# Altium PCB transmitter.PcbDoc (part 1 of 2)
Units mil, origin at the board's own origin, x right, y up, seen from the top; angles counter-clockwise.
Board outline 2708.66 x 1574.8 mil, 2 copper layers (Top Layer, Bottom Layer), stack 65.792 mil thick; 44 components, 23 nets, 159 pads, 72 vias.
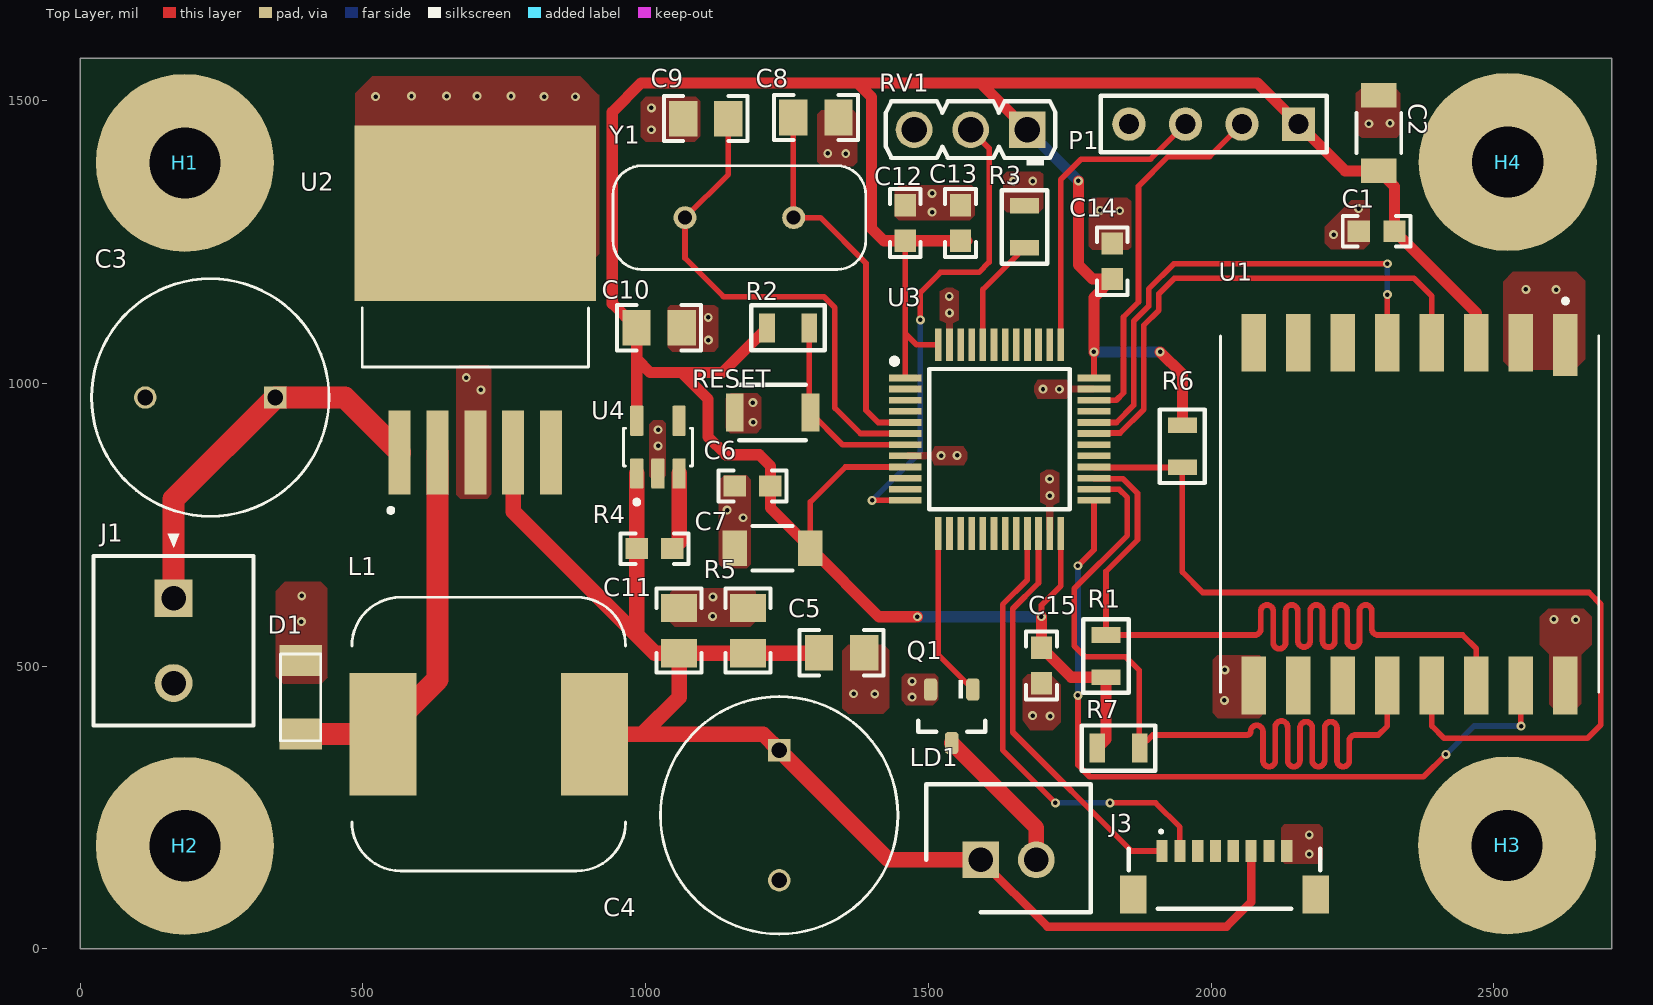
[diagram p0: Top Layer view]
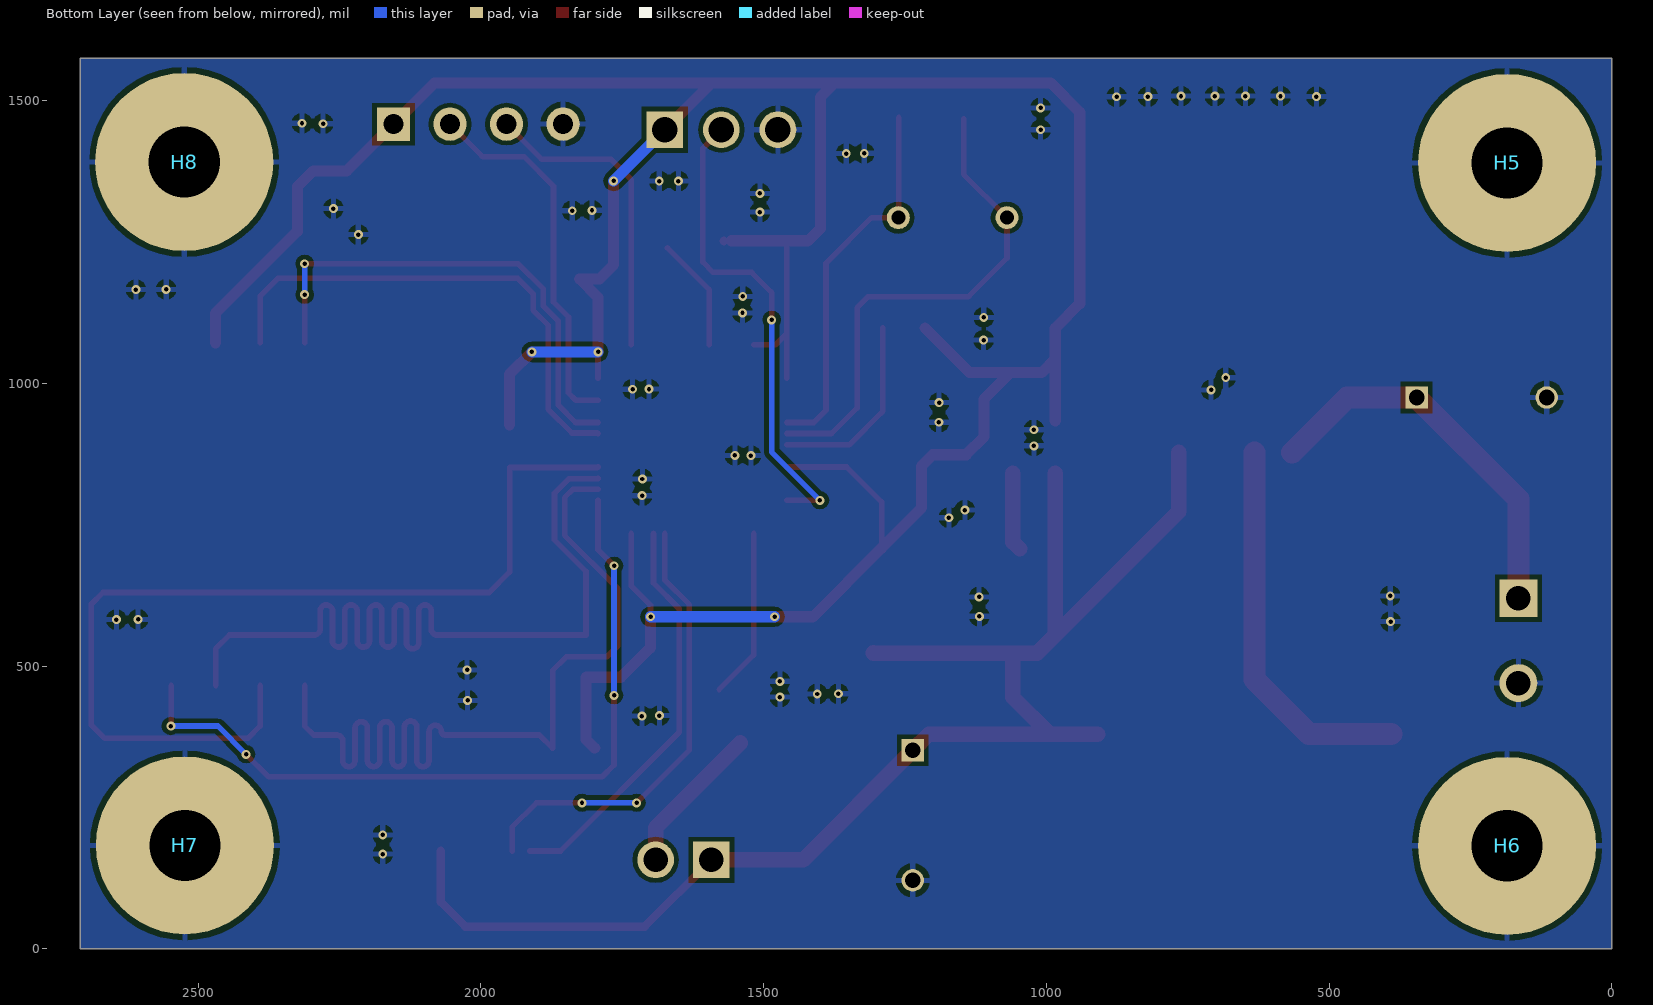
[diagram p1: Bottom Layer view, seen from below]
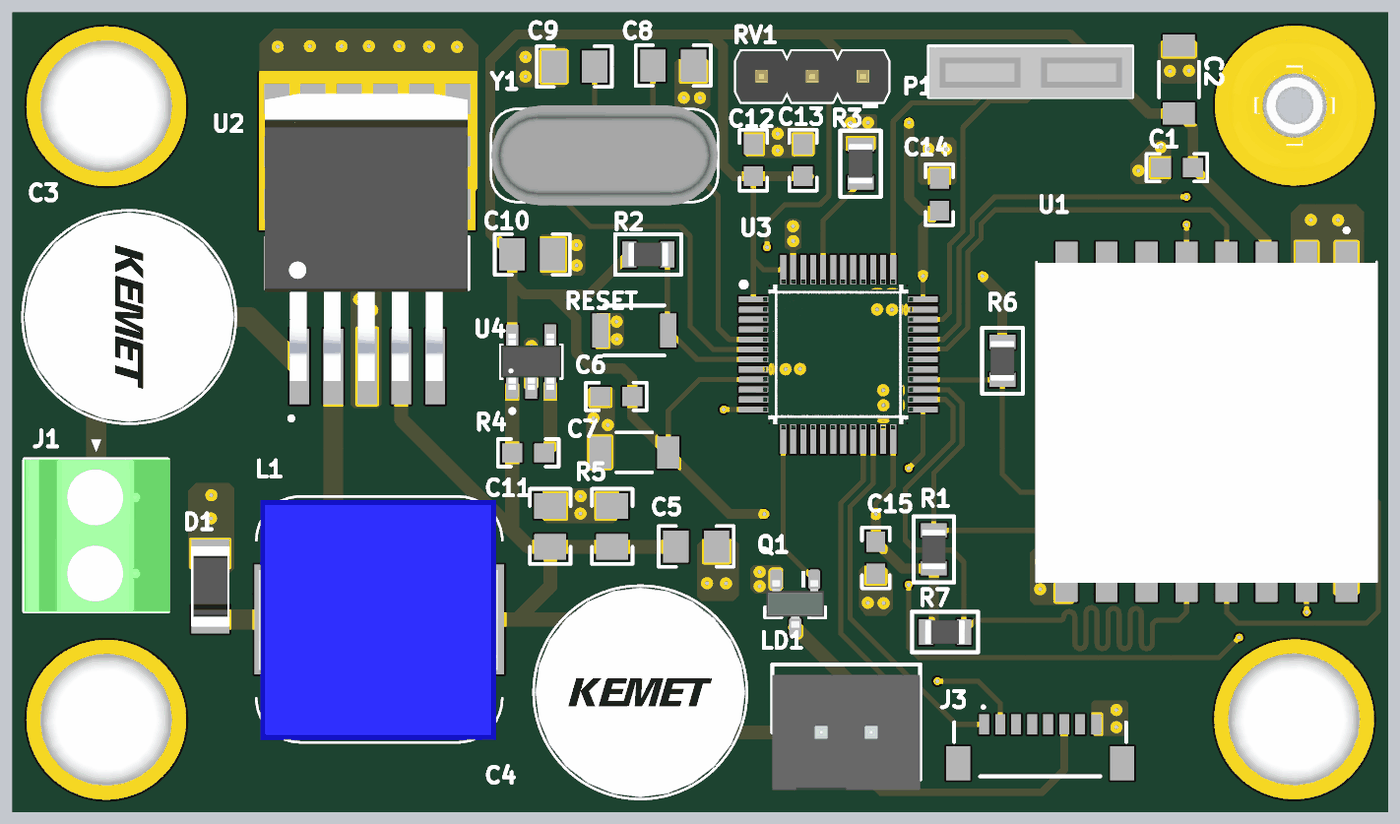
[diagram p2: 3D render of the assembled board from above, using the file's embedded part models]

## Layer stack, top to bottom
Top Solder: solder mask 0.4, Solder Resist, Dk 3.5
Top Layer: signal copper 1.4
Dielectric 1: dielectric 62.9921, FR-4, Dk 4.8
Bottom Layer: signal copper 1.4
Bottom Solder: solder mask 0.4, Solder Resist, Dk 3.5

## Board outline
0,0.39 0,1575.2 2708.66,1575.2 2708.66,0.39

## Design rules (kind name [scope] priority, off if disabled: settings)
Clearance [All] p1: gap=7.87 ignorepadtopadclearanceinfootprint=TRUE
ComponentClearance [All] p1: gap=0 collisioncheckmode=3 verticalgap=0 showdistances=FALSE
HoleSize [All] p1: absolutevalues=TRUE maxlimit=137.8 minlimit=1 maxpercent=80.000 minpercent=20.000
MatchedLengths SPI_Trace [InNetClass('SPI')] p1: tolerance=39.37 checknetsindiffpair=FALSE checkdiffpairvsdiffpair=TRUE checkxsignals=TRUE checkothers=TRUE
MinimumSolderMaskSliver [All] p1: minsoldermaskwidth=0
PolygonConnect [All] p1: connectstyle=Relief reliefconductorwidth=10 reliefentries=4 polygonreliefangle="90 Angle" airgapwidth=10
RoutingVias [All] p1: holewidth=7.87 width=15.75 viastyle="Through Hole" minholewidth=7.87 minwidth=15.75 maxholewidth=7.87 maxwidth=15.75
SilkToSilkClearance [All] p1: silktosilkclearance=0
SilkToSolderMaskClearance [IsPad] p1: minsilkscreentomaskgap=0 clearancetoexposedcopper=TRUE
SolderMaskExpansion [All] p1: expansion=4
Width 12V_W [InNet('~12V')] p1: maxlimit=39.37 minlimit=10 preferedwidth=39.37
Width 3V3_W [InNet('3V3')] p2: maxlimit=19.68 minlimit=10 preferedwidth=19.68
Width 5V_W [InNet('+5V')] p3: maxlimit=27.56 minlimit=10 preferedwidth=27.56
Width [All] p4: maxlimit=39.37 minlimit=10 preferedwidth=10
25 further rules are at their usual default settings.

## Classes and differential pairs
net class SPI: MISO MOSI SCK
net class PWR: 3V3 +5V NetD1_2 ~12V
component class transmitter: C1 C2 C3 C4 C5 C6 C7 C8 C9 C10 C11 C12 C13 C14 C15 D1 J1 J3 L1 LD1 P1 Q1 R1 R2 R3 R4 R5 R6 R7 RESET RV1 U2 U3 U4 Y1
component class tr_auxiliary: H1 H2 H3 H4 H5 H6 H7 H8

## Components (designator, comment, footprint, x,y, rotation, side; value= is the part's Value field where it differs from the comment)
C1 "C1608X6S1C225K080AC" 0603 2292.91,1269.29 r180 top value=2.2uF
C2 "C3216X5R1V226M160AC" 1206_180 2296.85,1442.91 r90 top value=22uF
C3 "220u" CAPPRD250W50D630H1120B 230,975.2 r180 top
C4 "220u" CAPPRD250W50D630H1120B 1236.22,236.22 r270 top
C5 "EMK212BB7106MG-T" 0805_HV 1346.46,523.62 r0 top value=10uF
C6 "C1608X6S1C225K080AC" 0603 1188.98,818.9 r180 top value=2.2uF
C7 "C3216X5R1V226M160AC" 1206_180 1224.41,708.66 r180 top value=22uF
C8 "0805YD225KAT2A" 0805_HV 1301.18,1470.47 r0 top value=22pF
C9 "0805YD225KAT2A" 0805_HV 1106.3,1468.5 r180 top value=22pF
C10 "0805YD225KAT2A" 0805_HV 1023.62,1098.43 r0 top value=2.2uF
C11 "0805YD225KAT2A" 0805_HV 1059.06,562.99 r90 top value=2.2uF
C12 "C1608X6S1C225K080AC" 0603 1459.06,1283.86 r90 top value=2.2uF
C13 "C1608X6S1C225K080AC" 0603 1556.69,1283.86 r90 top value=2.2uF
C14 "C1608X6S1C225K080AC" 0603 1825.2,1216.14 r90 top value=2.2uF
C15 "C1608X6S1C225K080AC" 0603 1700,501.18 r270 top value=2.2uF
D1 "5.1V/0.5W" SOD-123 389.76,444.88 r90 top
H1 "NY PMS 440 0025 PH" "NY PMS 440 0025 PH" 185,1390.2 r0 top
H2 "NY PMS 440 0025 PH" "NY PMS 440 0025 PH" 185,182.32 r0 top
H3 "NY PMS 440 0025 PH" "NY PMS 440 0025 PH" 2523.62,183.07 r0 top
H4 "NY PMS 440 0025 PH" "NY PMS 440 0025 PH" 2524.8,1391.73 r0 top
H5 "1902C" Keystone_1902C 185,1390.2 r180 bottom
H6 "1902C" Keystone_1902C 185,182.32 r180 bottom
H7 "1902C" Keystone_1902C 2523.62,183.07 r180 bottom
H8 "1902C" Keystone_1902C 2524.8,1391.73 r180 bottom
J1 "1727010" PhoenixConact_1727010 165,545.2 r270 top
J3 "SM08B-SURS-TF(LF)(SN)" SM08B-SURS-TF 2023.62,177.17 r0 top
L1 "33uH" IND_MSS1210-153MEB 722.44,379.92 r90 top
LD1 "Header-2pin(2.5mm)" B2B-XH-A(LF)(SN) 1592.52,157.48 r0 top
P1 "0901471104" HDR1X4 2154.72,1458.66 r180 top
Q1 "DNBT8105-7" SOT-23 1541.34,411.42 r270 top value="60 V"
R1 "10K" R0805 1814.17,517.72 r270 top
R2 "10K" R0805 1251.97,1098.43 r180 top
R3 "10K" R0805 1670.08,1277.17 r270 top
R4 "CRCW060310K0JNEA" 0603 1015.75,707.87 r180 top value=10k
R5 "CRCW0805510KJNEA" 0805_HV 1181.1,562.99 r270 top value=510k
R6 "10K" R0805 1949.21,888.98 r90 top
R7 "10K" R0805 1836.22,355.12 r180 top
RESET "B3U-1000P" SW_B3U-1000P 1224.41,948.82 r180 top
RV1 "Potentiometer" WURTH_61300311121 1574.8,1448.82 r180 top
U1 "RA-02/SX1278" MODULE_RA-02_LORA 2351.18,768.9 r270 top
U2 "LM2596S-5.0/NOPB" TO170P1524X483-6N 698.82,1129.92 r90 top
U3 "STM32L053C8T6" QFP50P900X900X160-48N 1625.98,901.57 r0 top
U4 "AP2112K-3.3TRG1" SOT95P285X140-5N 1021.65,887.4 r90 top
Y1 "16MHz" XTAL_ECS-160-20-4XDN 1165.75,1293.31 r180 top

## Footprints (in the part's own frame and the unit in brackets; to place one, negate y for a bottom-side part, rotate by r counter-clockwise, add the part's x,y. Pads: shape width x height; smd on the part's side, far side on the other; paste and mask are expansions set on the pad)
0603 [mm]
  rect 1x0.95 smd: 1(-0.8,0) 2(0.8,0)
  silkscreen extent -1.52,-0.69 1.52,0.69, body extent -0.87,-0.47 0.87,0.47, height 1
0805_HV [mil]
  rect 50x63 smd: 1(-40,0) 2(40,0)
  silkscreen extent -74,-40 74,40, body extent -43,-29 43,29, height 57
1206_180 [mm] "1206_180"
  rect 1.1x1.6 smd: 1(-1.7,0) 2(1.7,0)
  silkscreen extent -0.9,-1 0.9,1, body extent -1.75,-0.95 1.75,0.95, height 1.8
B2B-XH-A(LF)(SN) [mm]
  rect 1.65x1.65 hole 1.1: 1(0,0)
  round 1.65 hole 1.1: 2(2.5,0)
  silkscreen extent -2.45,-2.35 4.95,3.4, body extent -2.45,-2.88 4.95,2.88, height 7
CAPPRD250W50D630H1120B [mil]
  rect 39.69x39.69 hole 27.56: 1(-115,0)
  round 39.69 hole 27.56: 2(115,0)
  silkscreen extent -210,-210 210,210, body extent -207,-207 207,207, height 670
HDR1X4 [mm] "Connector; Header; 4 Position"
  rect 1.5x1.5 hole 0.9: 1(0,0)
  round 1.5 hole 0.9: 2(2.54,0) 3(5.08,0) 4(7.62,0)
  silkscreen extent -1.27,-1.27 8.89,1.27, body extent -1.28,-1.22 8.88,1.32, height 8.51
IND_MSS1210-153MEB [mm]
  rect 5.5x3 smd: 1(0,4.75) 2(0,-4.75)
  silkscreen extent -6.15,-6.15 6.15,6.15, body extent -6.03,-5.95 5.97,6.05, height 10.2
Keystone_1902C [mil]
  round 1 on Mech3: 0(0,0)
  body extent -145,-126 146,126, height 501
MODULE_RA-02_LORA [mm]
  rect 2.8x1.1 smd: 1(-7.6,7)
  rect 2.6x1.1 smd: 2(-7.7,5) 3(-7.7,3) 4(-7.7,1) 5(-7.7,-1) 6(-7.7,-3) 7(-7.7,-5) 8(-7.7,-7) 9(7.7,-7) 10(7.7,-5) 11(7.7,-3) 12(7.7,-1) 13(7.7,1) 14(7.7,3) 15(7.7,5) 16(7.7,7)
  silkscreen extent -9.68,-8.5 8,8.5, body extent -7.96,-8.47 8.04,8.53, height 2
"NY PMS 440 0025 PH" [mm]
  round 8 hole 3.2: 1(0,0)
  body extent -3.3,-3.3 3.3,3.3, height 2.69
PhoenixConact_1727010 [mm]
  rect 1.7x1.7 hole 1.1: 1(-1.905,0)
  round 1.7 hole 1.1: 2(1.905,0)
  silkscreen extent -4.8,-3.6 3.81,3.6, body extent -3.81,-3.6 3.81,3.7, height 8.52
QFP50P900X900X160-48N [mm]
  rect 1.475x0.3 smd: 1(-4.238,2.75) 2(-4.238,2.25) 3(-4.238,1.75) 4(-4.238,1.25) 5(-4.238,0.75) 6(-4.238,0.25) 7(-4.238,-0.25) 8(-4.238,-0.75) 9(-4.238,-1.25) 10(-4.238,-1.75) 11(-4.238,-2.25) 12(-4.238,-2.75) 25(4.238,-2.75) 26(4.238,-2.25) 27(4.238,-1.75) 28(4.238,-1.25) 29(4.238,-0.75) 30(4.238,-0.25) 31(4.238,0.25) 32(4.238,0.75) 33(4.238,1.25) 34(4.238,1.75) 35(4.238,2.25) 36(4.238,2.75)
  rect 0.3x1.475 smd: 13(-2.75,-4.238) 14(-2.25,-4.238) 15(-1.75,-4.238) 16(-1.25,-4.238) 17(-0.75,-4.238) 18(-0.25,-4.238) 19(0.25,-4.238) 20(0.75,-4.238) 21(1.25,-4.238) 22(1.75,-4.238) 23(2.25,-4.238) 24(2.75,-4.238) 37(2.75,4.238) 38(2.25,4.238) 39(1.75,4.238) 40(1.25,4.238) 41(0.75,4.238) 42(0.25,4.238) 43(-0.25,4.238) 44(-0.75,4.238) 45(-1.25,4.238) 46(-1.75,4.238) 47(-2.25,4.238) 48(-2.75,4.238)
  silkscreen extent -4.85,-3.15 3.15,3.62, body extent -4.5,-4.5 4.5,4.5, height 1.6
R0805 [mm]
  rect 0.7x1.3 smd: 1(-0.95,0) 2(0.95,0)
  silkscreen extent -1.65,-1.02 1.65,1.02, body extent -1,-0.6 1,0.6, height 0.7
SM08B-SURS-TF [mm]
  rect 0.5x1 smd: 1(-2.8,-0.1) 2(-2,-0.1) 3(-1.2,-0.1) 4(-0.4,-0.1) 5(0.4,-0.1) 6(1.2,-0.1) 7(2,-0.1) 8(2.8,-0.1)
  rect 1.2x1.7 smd: 9(-4.1,-2.05) 10(4.1,-2.05)
  silkscreen extent -4.3,-2.7 4.3,0.8
SOD-123 [mm]
  rect 1.4x1.9 smd: 1(1.65,0) 2(-1.65,0)
  silkscreen extent -1.95,-0.9 1.95,0.9, body extent -1.95,-0.85 1.95,1.65, height 4.52
SOT95P285X140-5N [mm]
  rrect15% 1.35x0.6 smd: 1(-1.185,0.95) 2(-1.185,0) 3(-1.185,-0.95) 4(1.185,-0.95) 5(1.185,0.95)
  silkscreen extent -2.57,-1.55 0.85,1.55, body extent -1.4,-1.5 1.4,1.5, height 1.31
SOT-23 [mm]
  rrect50% 1x0.6 smd: 1(-1.2,0.95) 2(-1.2,-0.95) 3(1.2,0)
  silkscreen extent -1.63,-1.5 0.7,1.5, body extent -1.16,-1.45 1.21,1.45, height 1
SW_B3U-1000P [mm]
  rect 0.8x1.7 smd: 1(-1.7,0) 2(1.7,0)
  silkscreen extent -1.5,-1.25 1.5,1.25, body extent -1.5,-1.25 1.5,1.25, height 1.75
TO170P1524X483-6N [mm]
  rect 3.79x0.99 smd: 1(-6.4,3.4) 2(-6.4,1.7) 3(-6.4,0) 4(-6.4,-1.7) 5(-6.4,-3.4)
  rect 7.88x10.84 smd paste-6: 6(4.35,0)
  silkscreen extent -9.1,-5.08 0.09,5.08, body extent -7.13,-5.03 7.23,5.13, height 4.66
WURTH_61300311121 [mm]
  rect 1.65x1.65 hole 1.15: 1(-2.54,0)
  round 1.65 hole 1.15: 2(0,0) 3(2.54,0)
  silkscreen extent -3.81,-1.27 3.81,1.6, body extent -3.81,-1.27 3.81,1.27, height 8.54
XTAL_ECS-160-20-4XDN [mm]
  round 1.03 hole 0.63: 1(-2.44,0) 2(2.44,0)
  silkscreen extent -5.68,-2.33 5.68,2.33, body extent -5.68,-2.5 5.67,2.5, height 2.11

## Part data
C1 C6: "CAP, CERM, 2.2 µF, 16 V, +/- 10%, X6S, 0603", Cap_Case=0603, Manufacturer=TDK, Supplier Part Number 1=445-7438-1-ND, TempCo=X6S, Tolerance_%=10, Value1="0.007674 ohm", Value2=16V, ValueDisplayed=2.2µF, AEC Category=Q200, AEC Grade=N/A, AEC Qualified=N, Cap_F=0.0000022, ComponentLink1Description="Datasheet link", ComponentLink1URL=https://product.tdk.com/en/search/capacitor/ceramic/mlcc/info?part_no=C1608X6S1C225K080AC, CompType=Capacitor, ESR_ohm=0.007674, IRMS_A=1.87823, LatestRevisionDate=2017-04-28, MountType=SMT, PackageReference=0603, PartNumber=C1608X6S1C225K080AC, Polarized=N, Published=2008-06-19, Publisher="Texas Instruments", RoHS=Y, SizeArea_mm2=1.28, SizeAreaWB_mm2=4.68, SizeX_mm=1.6, SizeY_mm=0.8, SizeZ_mm=1, Supplier 1=Digi-Key, Supplier 2=Mouser, Supplier Part Number 2=810-C1608X6S1C225K080AC, SymbolVersion=2008-07-09, TaMax_C=105, TaMin_C=-55, Technology=Ceramic, U/M=EA, VDC_V=16
C2 C7: "CAP, CERM, 22 µF, 35 V,+/- 20%, X5R, 1206", Cap_Case=1206, Manufacturer=TDK, Supplier Part Number 1=445-8045-1-ND, TempCo=X5R, Tolerance_%=20, Value1="0.002398 ohm", Value2=35V, ValueDisplayed=22µF, AEC Category=Q200, AEC Grade=N/A, AEC Qualified=N, Cap_F=0.000022, ComponentLink1Description="Datasheet link", ComponentLink1URL=https://product.tdk.com/en/search/capacitor/ceramic/mlcc/info?part_no=C3216X5R1V226M160AC, CompType=Capacitor, ESR_ohm=0.002398, Green_EU RoHS=Passed, Green_EU RoHS-2=Passed, Green_Lifecycle=Active, Green_REACh=Passed, IRMS_A=4.68507, LatestRevisionDate=2017-06-22, MountType=SMT, PackageReference=1206, PartNumber=C3216X5R1V226M160AC, Polarized=N, Published=2008-06-19, Publisher="Texas Instruments", RoHS=Y, SizeArea_mm2=5.12, SizeAreaWB_mm2=10.92, SizeX_mm=3.2, SizeY_mm=1.6, SizeZ_mm=1.8, Supplier 1=Digi-Key, Supplier 2=Newark, Supplier 3=Mouser, Supplier Part Number 2=04X3299, Supplier Part Number 3=810-C3216X5R1V226M, SymbolVersion=2008-07-09, TaMax_C=85, TaMin_C=-55, Technology=Ceramic, U/M=EA, VDC_V=35
C3 C4: library part UCS2C221MHD1TN, "CAP ALUM 220UF 20% 160V RADIAL", Capacitance=220uF, Case/Package=Radial, Manufacturer=Nichicon, Max Operating Temperature=105°C, Min Operating Temperature=-40°C, Package Quantity=250, Ripple Current=2.37A, Supplier Part Number 1=493-13277-3-ND, Tolerance=20%, Voltage Rating=160V, ComponentLink1Description=http://www.nichicon.co.jp/english/products/pdfs/e-cs.pdf?src-supplier=Avnet, ComponentLink1URL=http://www.nichicon.co.jp/english/products/pdfs/e-cs.pdf?src-supplier=Avnet, ComponentLink2Description=http://nichicon-us.com/english/products/pdfs/e-ucs.pdf?src-supplier=Digi-Key, ComponentLink2URL=http://nichicon-us.com/english/products/pdfs/e-ucs.pdf?src-supplier=Digi-Key, ComponentLink3Description=http://nichicon-us.com/english/products/pdfs/e-ch_ta.pdf?src-supplier=Digi-Key, ComponentLink3URL=http://nichicon-us.com/english/products/pdfs/e-ch_ta.pdf?src-supplier=Digi-Key, ComponentLink4Description=http://www.nichicon.co.jp/english/products/pdfs/e-cs.pdf?src-supplier=Avnet+Europe, ComponentLink4URL=http://www.nichicon.co.jp/english/products/pdfs/e-cs.pdf?src-supplier=Avnet+Europe, Diameter=16mm, Height=25mm, Height - Seated (Max)=1.063inch, Lead Diameter=0.8mm, Lead Pitch=7.5mm, Life (Hours)=10000Hour, Manufacturer Part Number=UCS2C221MHD1TN, Mount="Through Hole", Packaging="Tape and Reel", Pricing 1="250=0.7974, 500=0.6778, 750=0.6379, 1250=0.5981, 2500=0.5582, 6250=0.5383, 12500=0.5084, 25000=0.4984 (USD)", Radiation Hardening=No, Stock 1=84250, Supplier 1=Digi-Key, Termination=Radial
C5: "CAP, CERM, 10 µF, 16 V, +/- 20%, X7R, 0805", Cap_Case=0805, Manufacturer="Taiyo Yuden", Supplier Part Number 1=587-3319-1-ND, TempCo=X7R, Tolerance_%=20, Value1=Unknown, Value2=16V, ValueDisplayed=10µF, AEC Category=Q200, AEC Qualified=?, Cap_F=0.00001, ComponentLink1Description="Datasheet link", ComponentLink1URL=http://www.yuden.co.jp/productdata/catalog/en/mlcc_all_e.pdf, CompType=Capacitor, LatestRevisionDate=2017-01-20, MountType=SMT, PackageReference=0805, PartNumber=EMK212BB7106MG-T, Polarized=N, Published=2008-06-19, Publisher="Texas Instruments", RoHS=Y, SizeArea_mm2=2.5, SizeAreaWB_mm2=6.75, SizeX_mm=2, SizeY_mm=1.25, SizeZ_mm=1.45, Supplier 1=Digi-Key, Supplier 2=Mouser, Supplier Part Number 2=963-EMK212BB7106MG-T, SymbolVersion=2008-07-09, TaMax_C=125, TaMin_C=-55, Technology=Ceramic, U/M=EA, VDC_V=16
C8 C9: "CAP, CERM, 2.2 µF, 16 V, +/- 10%, X5R, 0805", Cap_Case=0805, Manufacturer=AVX, Supplier Part Number 1=478-2580-1-ND, TempCo=X5R, Tolerance_%=10, Value1="0.009 ohm", Value2=16V, ValueDisplayed=22pF, Cap_F=0.0000022, ComponentLink1Description="Datasheet link", ComponentLink1URL=http://www.avx.com/docs/masterpubs/smccp.pdf, CompType=Capacitor, ESR_ohm=0.009, LatestRevisionDate=2014-12-30, MountType=SMT, PackageReference=0805, PartNumber=0805YD225KAT2A, Polarized=N, Published=2008-06-19, Publisher="Texas Instruments", RoHS=Y, Supplier 1=Digi-Key, Supplier 2=Mouser, Supplier 3=Farnell, Supplier Part Number 2=581-0805YD225K, Supplier Part Number 3=1650715, SymbolVersion=2008-07-09, TaMax_C=85, TaMin_C=-55, Technology=Ceramic, U/M=EA, VDC_V=16
C10 C11: "CAP, CERM, 2.2 µF, 16 V, +/- 10%, X5R, 0805", Cap_Case=0805, Manufacturer=AVX, Supplier Part Number 1=478-2580-1-ND, TempCo=X5R, Tolerance_%=10, Value1="0.009 ohm", Value2=16V, ValueDisplayed=2.2µF, Cap_F=0.0000022, ComponentLink1Description="Datasheet link", ComponentLink1URL=http://www.avx.com/docs/masterpubs/smccp.pdf, CompType=Capacitor, ESR_ohm=0.009, LatestRevisionDate=2014-12-30, MountType=SMT, PackageReference=0805, PartNumber=0805YD225KAT2A, Polarized=N, Published=2008-06-19, Publisher="Texas Instruments", RoHS=Y, Supplier 1=Digi-Key, Supplier 2=Mouser, Supplier 3=Farnell, Supplier Part Number 2=581-0805YD225K, Supplier Part Number 3=1650715, SymbolVersion=2008-07-09, TaMax_C=85, TaMin_C=-55, Technology=Ceramic, U/M=EA, VDC_V=16
C12 C13 C14 C15: "CAP, CERM, 2.2 µF, 16 V, +/- 10%, X6S, 0603", Cap_Case=0603, Manufacturer=TDK, Supplier Part Number 1=445-7438-1-ND, TempCo=X6S, Tolerance_%=10, Value1="0.007674 ohm", Value2=16V, ValueDisplayed=0.1µF, AEC Category=Q200, AEC Grade=N/A, AEC Qualified=N, Cap_F=0.0000022, ComponentLink1Description="Datasheet link", ComponentLink1URL=https://product.tdk.com/en/search/capacitor/ceramic/mlcc/info?part_no=C1608X6S1C225K080AC, CompType=Capacitor, ESR_ohm=0.007674, IRMS_A=1.87823, LatestRevisionDate=2017-04-28, MountType=SMT, PackageReference=0603, PartNumber=C1608X6S1C225K080AC, Polarized=N, Published=2008-06-19, Publisher="Texas Instruments", RoHS=Y, SizeArea_mm2=1.28, SizeAreaWB_mm2=4.68, SizeX_mm=1.6, SizeY_mm=0.8, SizeZ_mm=1, Supplier 1=Digi-Key, Supplier 2=Mouser, Supplier Part Number 2=810-C1608X6S1C225K080AC, SymbolVersion=2008-07-09, TaMax_C=105, TaMin_C=-55, Technology=Ceramic, U/M=EA, VDC_V=16
D1: library part "5.1V/0.5W zener", "Diode Zener Single 5.1V 5% 500mW 2-Pin SOD-123 T/R", Case/Package=SOD-123-2, Forward Voltage=900mV, Manufacturer=Diodes, Manufacturer Part Number=MMSZ5231B-7-F, Max Operating Temperature=150°C, Max Power Dissipation=500mW, Max Reverse Current=5uA, Min Operating Temperature=-65°C, Package Quantity=3000, Supplier Part Number 1=MMSZ5231B-FDIDKR-ND, Test Current=20mA, Tolerance=5%, Voltage Rating (DC)=5.1V, ComponentLink1Description=http://www.jameco.com/Jameco/Products/ProdDS/1541116.pdf?src-supplier=Jameco, ComponentLink1URL=http://www.jameco.com/Jameco/Products/ProdDS/1541116.pdf?src-supplier=Jameco, ComponentLink2Description=http://www.mouser.com/ds/2/115/ds18010-38133.pdf?src-supplier=Mouser, ComponentLink2URL=http://www.mouser.com/ds/2/115/ds18010-38133.pdf?src-supplier=Mouser, ComponentLink3Description=https://www.verical.com/server-webapp/html/getDatasheet?partID=141394&src-supplier=Verical, ComponentLink3URL=https://www.verical.com/server-webapp/html/getDatasheet?partID=141394&src-supplier=Verical, Contact Plating=Tin,Matte, Element Configuration=Single, ESD Protection=No, Height=1.35mm, Impedance=17R, Lead Free="Lead Free", Length=3.85mm, Max Reverse Leakage Current=5uA, Mount="Surface Mount", Number of Pins=2, Packaging="Tape and Reel", Power Dissipation=500mW, Power Rating=500mW, Pricing 1="1=0.14, 10=0.126, 100=0.0596, 500=0.0354, 1000=0.0232 (USD)", Radiation Hardening=No, REACH SVHC="No SVHC", Stock 1=856806, Supplier 1=Digi-Key, Termination=SMD/SMT, Voltage Tolerance=5%, Weight=0.000353oz, Width=1.7mm, Working Voltage=5.1V, Zener Current=5uA, Zener Voltage=5.1V
H1 H2 H3 H4: "Machine Screw, Round, #4-40 x 1/4, Nylon, Philips panhead", DigiKeyPartNumber=H542-ND, Manufacturer="B&F Fastener Supply", ClassName="Mounting Holes", ComponentLink1Description="Datasheet Link", ComponentLink1URL=http://www.fasnetdirect.com/refguide/Nylpanms.pdf, CompType=Hardware, LatestRevisionDate=2015-08-27, MountType=N/A, PackageReference=Screw, PartNumber="NY PMS 440 0025 PH", Publisher="Texas Instruments", RoHS=Y, Supplier 1=Digi-Key, Supplier Part Number 1=H542-ND, SymbolCreator=codlsc, SymbolVersion=2009-10-28, U/M=EA
H5 H6 H7 H8: "Standoff, Hex, 0.5\"L #4-40 Nylon", Manufacturer=Keystone, Supplier Part Number 1=36-1902C-ND, ComponentLink1Description="Datasheet Link", ComponentLink1URL=http://www.keyelco.com/pdfs/M55-prod31.pdf, CompType=Hardware, LatestRevisionDate=2015-08-27, MountType=N/A, PackageReference=Standoff, PartNumber=1902C, Publisher="Texas Instruments", RoHS=Y, Supplier 1=Digi-Key, SymbolCreator=a0412235, SymbolVersion=2013-06-24
J1: "Conn Term Block, 2POS, 3.81mm, TH", Manufacturer="Phoenix Contact", Supplier Part Number 1=277-1947-ND, ComponentLink1Description="Datasheet URL", ComponentLink1URL=http://eshop.phoenixcontact.com/phoenix/pdf.do?UID=1727010&general=usen, CompType="Terminal Block", LatestRevisionDate=2016-07-13, MountType=TH, PackageReference="2POS Terminal Block", PartNumber=1727010, Publisher="Texas Instruments", RoHS=Y, Supplier 1=Digi-Key, SymbolCreator=a0412235, SymbolVersion=2013-09-04
J3: "CONN HEADER SMD R/A 8POS 0.8MM", Color=Natural, Current Rating=500mA, Flammability Rating="UL94 V-0", Insulation Resistance=100MR, Manufacturer=JST, Max Operating Temperature=85°C, Min Operating Temperature=-25°C, Supplier Part Number 1=455-2040-6-ND, Voltage Rating=50V, Working Voltage=30V, Body Plating=Tin, ComponentLink1Description=http://www.jst-mfg.com/product/pdf/eng/eSUR.pdf?src-supplier=Digi-Key, ComponentLink1URL=http://www.jst-mfg.com/product/pdf/eng/eSUR.pdf?src-supplier=Digi-Key, ComponentLink2Description=http://www.jst-mfg.com/product/pdf/eng/eSUR.pdf?src-supplier=Future+Electronics, ComponentLink2URL=http://www.jst-mfg.com/product/pdf/eng/eSUR.pdf?src-supplier=Future+Electronics, Connector Type="Outer Shroud Contact", Contact Material="Copper Alloy,Bronze,Brass", Contact Plating=Tin, Contact Type="Outer Shroud Contact", Gender=Male, Insulation Material=Nylon, Lead Free="Lead Free", Lead Pitch=0.8mm, Manufacturer Part Number=SM08B-SURS-TF(LF)(SN), Material=Polyamide, Mount="Surface Mount", Number of Contacts=8, Number of Poles=8, Number of Positions=8, Number of Rows=1, Packaging="Tape and Reel", Pitch=0.031inch, Pricing 1="1=1.09, 10=0.958, 100=0.8263, 500=0.6761, 1000=0.6009 (USD)", REACH SVHC="No SVHC", Series=SUR, Stock 1=2871, Supplier 1=Digi-Key, Termination=IDC, Wire/Cable Gauge=32AWG
L1: library part MSS1210-333MEB, "Inductor COILCRAFT         MSS1210-333MEB             Surface Mount Power Inductor, MSS1210 Series, 1 mH, 1 A, 980 mA, Shielded, 1.03 ohm", Case/Package=SMD/SMT, DC Resistance (DCR)=1.03R, Inductance=1mH, Inductance Tolerance=10%, Manufacturer=Coilcraft, Manufacturer Part Number=MSS1210-105KED, Max DC Current=1A, Max Operating Temperature=85°C, Min Operating Temperature=-40°C, Package Quantity=300, Saturation Current=980mA, Self Resonant Frequency=1.1MHz, Supplier Part Number 1=994-MSS1210-105KED, Test Frequency=100kHz, ComponentLink1Description=http://www.farnell.com/datasheets/1681953.pdf?src-supplier=Element14, ComponentLink1URL=http://www.farnell.com/datasheets/1681953.pdf?src-supplier=Element14, ComponentLink2Description=http://www.mouser.com/ds/2/597/mss1210-270677.pdf?src-supplier=Mouser, ComponentLink2URL=http://www.mouser.com/ds/2/597/mss1210-270677.pdf?src-supplier=Mouser, Core Material=Ferrite, Height=10.2mm, Lead Free="Contains Lead", Length=12.3mm, Mount="Surface Mount", Packaging="Tape and Reel", Pricing 1="1=2.26, 10=2.02, 50=1.82, 100=1.62, 1000=1.17, 10000=1.09 (USD)", REACH SVHC="No SVHC", RMS Current (Irms)=1A, Series=MSS1210, Shielding=Shielded, Stock 1=518, Supplier 1=Mouser, Termination=SMD/SMT, Tolerance=10%, Width=12.3mm
LD1: library part B2B-XH-A(LF)(SN), "Conn Shrouded Header (4 Sides) HDR 2 POS 2.5mm Solder ST Thru-Hole Box", Color=Natural, Contact Resistance=20mR, Current Rating=3A, Housing Color=White, Insulation Resistance=1GR, Manufacturer=JST, Max Operating Temperature=85°C, Max Voltage Rating (AC)=250V, Min Operating Temperature=-25°C, Supplier Part Number 1=455-2247-ND, ComponentLink1Description=http://www.farnell.com/datasheets/2057209.pdf?src-supplier=Element14, ComponentLink1URL=http://www.farnell.com/datasheets/2057209.pdf?src-supplier=Element14, ComponentLink2Description=http://www.rapidonline.com/pdf/523653.pdf?src-supplier=Rapid+Electronics, ComponentLink2URL=http://www.rapidonline.com/pdf/523653.pdf?src-supplier=Rapid+Electronics, ComponentLink3Description=https://www.verical.com/server-webapp/html/getDatasheet?partID=640357&src-supplier=Verical, ComponentLink3URL=https://www.verical.com/server-webapp/html/getDatasheet?partID=640357&src-supplier=Verical, ComponentLink4Description=https://www.verical.com/server-webapp/html/getDatasheet?partID=385291&src-supplier=Verical, ComponentLink4URL=https://www.verical.com/server-webapp/html/getDatasheet?partID=385291&src-supplier=Verical, Connector Type="Male Pin", Contact Material=Brass, Contact Plating=Tin,Copper,Lead, Contact Type="Male Pin", Depth=5.75mm, Fastening Type=Detent, Housing Material=Polyamide, Lead Free="Lead Free", Lead Pitch=2.5mm, Length=7.4mm, Manufacturer Part Number=B2B-XH-A(LF)(SN), Max Current Rating=3A, Max Voltage Rating (DC)=250V, Mount="Through Hole", Number of Contacts=2, Number of Positions=2, Number of Rows=1, Orientation=Straight, Packaging=Bulk, Pitch=2.5mm, Pricing 1="1=0.15, 10=0.141, 25=0.1048, 50=0.0898, 250=0.0748, 750=0.0673, 1000=0.0628, 12000=0.0479, 24000=0.0434 (USD)", REACH SVHC="No SVHC", Series=XH, Stock 1=124367, Supplier 1=Digi-Key, Termination=Solder, Voltage Rating=250V, Voltage Rating (AC)=250V, Wire/Cable Gauge=22AWG
P1: "Conn Socket Strip F 4 POS 2.54mm Solder ST Thru-Hole C-Grid® Tube", Color=Black, Manufacturer=Molex, Max Operating Temperature=105°C, Min Operating Temperature=-55°C, Package Quantity=4160, Supplier Part Number 1=WM14831-ND, ComponentLink1Description=http://www.molex.com/pdm_docs/sd/901471102_sd.pdf?src-supplier=Digi-Key, ComponentLink1URL=http://www.molex.com/pdm_docs/sd/901471102_sd.pdf?src-supplier=Digi-Key, Connector Type=Receptacle, Contact Material=Bronze, Contact Plating=Tin, Contact Type="Female Socket", Depth=2.54mm, Housing Color=Black, Housing Material=Polyester, Length=10.16mm, Manufacturer Part Number=0901471104, Mount="Through Hole", Number of Contacts=4, Number of Positions=4, Number of Rows=1, Orientation=Straight, Packaging=Rail/Tube, Pitch=0.1inch, Pricing 1="1=1.51, 10=1.288, 100=1.064, 1000=0.84, 5000=0.7448, 10000=0.728 (USD)", Series="C-Grid® 90147", Stock 1=23124, Supplier 1=Digi-Key, Termination=Solder
Q1: library part "DNBT8105-7, Diodes Inc.", "Transistor, NPN, 60 V, 1 A, AEC-Q101, SOT-23", Manufacturer="Diodes Inc.", Supplier Part Number 1=DNBT8105DICT-ND, Value1="1 A", Value2=300, AEC Category=Q101, AEC Qualified=Y, ComponentLink1Description="Datasheet link", ComponentLink1URL=https://www.diodes.com/assets/Datasheets/ds30513.pdf, CompType=BJT, HfeMax=300, IcRated_A=1, LatestRevisionDate=2017-04-05, MountType=SMT, NPN=1, PackageReference=SOT-23, PartNumber=DNBT8105-7, PNP=0, Published=2008-07-31, Publisher="Texas Instruments", RoHS=Y, SizeArea_mm2=7.5, SizeAreaWB_mm2=14, SizeX_mm=2.5, SizeY_mm=3, SizeZ_mm=1.1, Supplier 1=Digi-Key, Supplier 2=Newark, Supplier 3=Mouser, Supplier Part Number 2=25R4543, Supplier Part Number 3=621-DNBT8105-7, SymbolVersion=2008-07-31, TaMax_C=150, TaMin_C=-55, U/M=EA, Vceo_V=60, Vcesat1_V=0.25
R1 R2 R3 R6 R7: library part RC0805FR-0722RL, "RES SMD 22 OHM 1% 1/8W 0805", Manufacturer=Yageo, Operating Temperature="-55°C ~ 155°C", Package / Case="0805 (2012 Metric)", Power (Watts)="0.125W, 1/8W", Resistance (Ohms)=22, Supplier Device Package=0805, Supplier Part Number 1=311-22.0CRCT-ND, Temperature Coefficient=±100ppm/°C, Tolerance=±1%, .Checked PCB=RF, .Checked SCH=RF, .Creator=MM, Category=Resistors, ComponentLink1Description=http://www.yageo.com/documents/recent/PYu-RC_Group_51_RoHS_L_1.pdf, ComponentLink1URL=http://www.yageo.com/documents/recent/PYu-RC_Group_51_RoHS_L_1.pdf, Composition="Thick Film", Features="Moisture Resistant", Height="0.024\" (0.60mm)", Manufacturer Part Number=RC0805FR-0722RL, Number of Terminations=2, Packaging="Cut Tape (CT)", Pricing 1="1=0.1, 10=0.021, 25=0.0148, 100=0.0084, 250=0.0064, 500=0.0051, 1000=0.00376, 2500=0.00326 (USD)", RoHS="RoHS Compliant", Size / Dimension="0.079\" L x 0.049\" W (2.00mm x 1.25mm)", Stock 1=63849, Supplier 1=Digi-Key
R4: "RES, 10 k, 5%, 0.1 W, 0603", Manufacturer=Vishay-Dale, Power_W=0.1, Supplier Part Number 1=541-10KGCT-ND, TempCo="200 ppm/C", Tolerance_%=5, Value1=5%, Value2=0.1W, Value_Code=10k0, ValueDisplayed=10k, AEC Category=Q200, AEC Qualified=?, ComponentLink1Description="Datasheet link", ComponentLink1URL=http://www.vishay.com/docs/20035/dcrcwe3.pdf, CompType=Resistor, EIA_Code=E24, LatestRevisionDate=2016-07-29, MountType=SMT, PackageReference=0603, PartNumber=CRCW060310K0JNEA, Published=2008-06-26, Publisher="Texas Instruments", Res_ohm=10000, RoHS=Y, SizeArea_mm2=1.28, SizeX_mm=1.6, SizeY_mm=0.8, SizeZ_mm=1, Supplier 1=Digi-Key, Supplier 2=Mouser, Supplier 3=Farnell, Supplier Part Number 2=71-CRCW0603J-10K-E3, Supplier Part Number 3=1469749, SymbolVersion=2009-05-29, Technology="Thick Film", U/M=EA, VDC_V=75
R5: "RES, 510 k, 5%, 0.125 W, 0805", Manufacturer=Vishay-Dale, Power_W=0.125, Supplier Part Number 1=541-510KACT-ND, TempCo="200 ppm/C", Tolerance_%=5, Value1=5%, Value2=0.125W, Value_Code=510k, AEC Category=Q200, AEC Qualified=?, ComponentLink1Description="Datasheet link", ComponentLink1URL=http://www.vishay.com/docs/20035/dcrcwe3.pdf, CompType=Resistor, EIA_Code=E24, LatestRevisionDate=2016-05-05, MountType=SMT, PackageReference=0805, PartNumber=CRCW0805510KJNEA, Published=2008-06-26, Publisher="Texas Instruments", Res_ohm=510000, RoHS=Y, Supplier 1=Digi-Key, Supplier 2=Mouser, Supplier 3=Farnell, Supplier Part Number 2=71-CRCW0805J-510K-E3, Supplier Part Number 3=1537987, SymbolVersion=2009-05-29, Technology="Thick Film", U/M=EA, ValueDisplayed=510k, VDC_V=150
RESET: "SWITCH TACTILE SPST-NO 0.05A 12V", CurrentRating_mA=50, Manufacturer="Omron Electronic Components", Supplier Part Number 1=SW1020CT-ND, Circuit=SPST-NO, ComponentLink1Description="Datasheet URL", ComponentLink1URL=http://www.components.omron.com/components/web/PDFLIB.nsf/0/2DD3893C7DD33E9E862572900079E9D6/$file/B3U_1110.pdf, CompType=Switch, LatestRevisionDate=2015-08-27, MountType=SMT, Orientation="Top Actuated", PackageReference=3x1.6x2.5mm, PartNumber=B3U-1000P, PositionCount=1, Publisher="Texas Instruments", RoHS=Y, Supplier 1=Digi-Key, Supplier 2=Mouser, Supplier 3=Farnell, Supplier Part Number 2=653-B3U-1000P, Supplier Part Number 3=1333652, SwitchFunction=Off-Mom, SymbolCreator=a0412235, SymbolVersion=2012-10-29, VDC_V=12
RV1: library part 61300311121, "Header, 2.54 mm, 3x1, Gold, TH", Manufacturer="Wurth Elektronik", Supplier Part Number 1=732-5316-ND, ClassName=Header, ComponentLink1Description="Datasheet Link", ComponentLink1URL=http://katalog.we-online.de/em/datasheet/6130xx11121.pdf, CompType=Header, LatestRevisionDate=2015-05-12, MountType=TH, PackageReference="Header, 2.54mm, 3x1, TH", PartNumber=61300311121, Publisher="Texas Instruments", RoHS=Y, Supplier 1=Digi-Key, SymbolCreator=a0799628, SymbolVersion=2013-03-28, U/M=EA
U1: library part RA-02, "LoRA module"
U2: "Conv DC-DC 4.5V to 40V Inv/Step Down Single-Out 5V 3A 6-Pin(5+Tab) TO-263 Tube", Case/Package=TO-263, Manufacturer="TI National Semiconductor", Max Input Voltage=40V, Max Operating Temperature=125°C, Max Output Current=3A, Min Input Voltage=4.5V, Min Operating Temperature=-40°C, Nominal Output Voltage=5V, Package Quantity=45, Quiescent Current=5mA, Supplier Part Number 1=926-LM2596S-5.0/NOPB, Switching Frequency=173kHz, ComponentLink1Description=https://www.verical.com/server-webapp/html/getDatasheet?partID=112894&src-supplier=Verical, ComponentLink1URL=https://www.verical.com/server-webapp/html/getDatasheet?partID=112894&src-supplier=Verical, ComponentLink2Description=http://www.ti.com/lit/ds/symlink/lm2596.pdf?src-supplier=Digi-Key, ComponentLink2URL=http://www.ti.com/lit/ds/symlink/lm2596.pdf?src-supplier=Digi-Key, ComponentLink3Description=http://www.farnell.com/datasheets/1874590.pdf?src-supplier=Element14, ComponentLink3URL=http://www.farnell.com/datasheets/1874590.pdf?src-supplier=Element14, ComponentLink4Description=https://www.distrelec.biz/Web/Downloads/xx/_e/jqLM2596x-xx_e.pdf?mime=application%2Fpdf&src-supplier=Distrelec, ComponentLink4URL=https://www.distrelec.biz/Web/Downloads/xx/_e/jqLM2596x-xx_e.pdf?mime=application%2Fpdf&src-supplier=Distrelec, ComponentLink5Description=http://www.ti.com/lit/ds/symlink/lm2596.pdf?src-supplier=Avnet+Asia, ComponentLink5URL=http://www.ti.com/lit/ds/symlink/lm2596.pdf?src-supplier=Avnet+Asia, ComponentLink6Description=http://www.jameco.com/Jameco/Products/ProdDS/836385.pdf?src-supplier=Jameco, ComponentLink6URL=http://www.jameco.com/Jameco/Products/ProdDS/836385.pdf?src-supplier=Jameco, ComponentLink7Description=http://www.produktinfo.conrad.com/datenblaetter/1000000-1099999/001013813-da-01-en-IC_REG_BUC_LM2596S_5_0_NOPB_TO_263_5_TID.pdf?src-supplier=Conrad, ComponentLink7URL=http://www.produktinfo.conrad.com/datenblaetter/1000000-1099999/001013813-da-01-en-IC_REG_BUC_LM2596S_5_0_NOPB_TO_263_5_TID.pdf?src-supplier=Conrad, Contact Plating=Tin,Matte, Efficiency=80%, Height=4.57mm, Lead Free="Contains Lead", Length=10.16mm, Manufacturer Part Number=LM2596S-5.0/NOPB, Mount="Surface Mount", Number of Outputs=1, Number of Pins=5, Operating Supply Voltage=40V, Output Current=3A, Output Type=Fixed, Output Voltage=5V, Packaging=Rail/Tube, Pricing 1="1=5.73, 10=5.15, 50=4.86, 100=4, 1000=2.88, 10000=2.77 (USD)", Radiation Hardening=No, REACH SVHC="No SVHC", Series=LM2596, Stock 1=1433, Supplier 1=Mouser, Weight=0.25lb, Width=8.64mm
U3: "IC MCU 32BIT 64KB FLASH 48LQFP", Case/Package=LQFP, Frequency=32MHz, Manufacturer=STMicroelectronics, Max Operating Temperature=85°C, Max Power Dissipation=363mW, Max Supply Voltage=3.6V, Min Operating Temperature=-40°C, Min Supply Voltage=1.8V, Package Quantity=1500, Supplier Part Number 1=497-14906-ND, ComponentLink1Description=http://www.st.com/st-web-ui/static/active/en/resource/technical/document/datasheet/DM00105960.pdf?src-supplier=Avnet, ComponentLink1URL=http://www.st.com/st-web-ui/static/active/en/resource/technical/document/datasheet/DM00105960.pdf?src-supplier=Avnet, Core Architecture=ARM, Data Bus Width=32b, Interface=I2C,SPI,USB,IrDA,UART,USART,I2S, Manufacturer Part Number=STM32L053C8T6, Max Frequency=32MHz, Memory Size=64KB, Memory Type=FLASH, Mount="Surface Mount", Number of ADC Channels=10, Number of I/Os=37, Number of Pins=48, Number of Programmable I/O=37, Number of Timers/Counters=5, Oscillator Type=Internal, Packaging=Tray, Peripherals="Brown-out Detect/Reset,POR,PWM,WDT,DMA,LCD", Pricing 1="1=4.81, 10=4.317, 25=4.0808, 80=3.5366, 250=3.3553, 500=3.0107, 1000=2.645 (USD)", RAM Size=8KB, REACH SVHC="No SVHC", Stock 1=7814, Supplier 1=Digi-Key, Watchdog Timer=Yes, Weight=0.006409oz
U4: "IC REG LINEAR 3.3V 600MA SOT25", Case/Package=SOT-23-5, Dropout Voltage=250mV, Manufacturer=Diodes, Max Input Voltage=6V, Max Operating Temperature=85°C, Max Output Current=600mA, Min Input Voltage=2.5V, Min Operating Temperature=-40°C, Output Voltage=3.3V, Package Quantity=1, Quiescent Current=55uA, Supplier Part Number 1=AP2112K-3.3TRG1DIDKR-ND, Accuracy=1.5%, ComponentLink1Description=http://www.diodes.com/datasheets/AP2112.pdf?src-supplier=Avnet, ComponentLink1URL=http://www.diodes.com/datasheets/AP2112.pdf?src-supplier=Avnet, ComponentLink2Description=https://www.diodes.com/assets/Datasheets/AP2112.pdf?src-supplier=Digi-Key, ComponentLink2URL=https://www.diodes.com/assets/Datasheets/AP2112.pdf?src-supplier=Digi-Key, Height=1.3mm, Lead Free="Lead Free", Length=3.1mm, Manufacturer Part Number=AP2112K-3.3TRG1, Mount="Surface Mount", Number of Outputs=1, Number of Pins=5, Number of Regulators=1, Output Current=600mA, Output Type=Fixed, Packaging="Tape and Reel", Polarity=Positive, Pricing 1="1=0.47, 10=0.355, 25=0.32, 100=0.1745, 250=0.1687, 500=0.1513, 1000=0.1164 (USD)", Stock 1=20198, Supplier 1=Digi-Key, Width=1.7mm
Y1: library part AS-16.000MAHK-B, "Crystals 16.000MHz 30ppm 20pF -40C to 85C", ESR (Equivalent Series Resistance)=50R, Frequency Stability=30ppm, Load Capacitance=20pF, Manufacturer=TXC, Max Operating Temperature=85°C, Min Operating Temperature=-40°C, Package Quantity=1000, Ratings=AEC-Q200, Supplier Part Number 1=887-1591-ND, ComponentLink1Description=http://www.txccrystal.com/images/pdf/as-automotive.pdf?src-supplier=Digi-Key, ComponentLink1URL=http://www.txccrystal.com/images/pdf/as-automotive.pdf?src-supplier=Digi-Key, ComponentLink2Description=http://www.farnell.com/datasheets/1639152.pdf?src-supplier=Element14, ComponentLink2URL=http://www.farnell.com/datasheets/1639152.pdf?src-supplier=Element14, ComponentLink3Description=http://www.farnell.com/datasheets/1639152.pdf?src-supplier=Farnell, ComponentLink3URL=http://www.farnell.com/datasheets/1639152.pdf?src-supplier=Farnell, ComponentLink4Description=http://www.mouser.com/ds/2/417/as-automotive-10001.pdf?src-supplier=Mouser, ComponentLink4URL=http://www.mouser.com/ds/2/417/as-automotive-10001.pdf?src-supplier=Mouser, ComponentLink5Description=http://components.arrow.com/part/dataview/57418299S591311N4258?src-supplier=Arrow+Electronics, ComponentLink5URL=http://components.arrow.com/part/dataview/57418299S591311N4258?src-supplier=Arrow+Electronics, Depth=5mm, Frequency=16MHz, Frequency Tolerance=30ppm, Height=0.145inch, Length=11.5mm, Manufacturer Part Number=AS-16.000MAHK-B, Mount="Through Hole", Number of Pins=2, Packaging=Bulk, Pricing 1="1=0.54, 10=0.45, 50=0.405, 100=0.36, 500=0.342, 1000=0.288, 2500=0.27, 5000=0.261, 10000=0.252 (USD)", REACH SVHC="No SVHC", Stock 1=672, Supplier 1=Digi-Key, Termination=Radial, Tolerance=30ppm, Width=0.197inch

## Via types
v1: diameter 15.75, hole 7.87, Top Layer to Bottom Layer, 72 vias

## Nets (pads, with @x,y where several pads share a name; then routed paths per layer and width w, separated by ;. In a path a pad name is that pad's centre, name@x,y a point inside that pad or via, vN(x,y) a via of type N, cw(c..) or ccw(c..) an arc to the next point about the centre after c; other vN are vias at no path point)
3V3: C1.1 C2.1 C6.1 C7.1 C10.1 C12.1 C13.1 C14.1 C15.1 P1.1 R1.2 R2.2 R6.2 R7.2 RV1.1 U1.3 U3.1 U3.9 U3.24 U3.36 U3.48 U4.5 | length 5970.6
  Top Layer w10: C7.1 1291.34,790.55 1353.15,852.36 U3.9 ; C12.1 1459.06,1088.58 ; U3.1 1459.06,1009.92 1459.06,1088.58 ; U3.48 1479.21,1068.43 1459.06,1088.58 ; v1(1700,587.4) 1700,607.87 1734.25,642.13 U3.24 ; U3.36 1792.91,1009.92 v1(1792.91,1055.91)
  Top Layer w15: C13.1@1570.47,1252.36 C13.1@1570.87,1251.97
  Top Layer w19.68: U4.5 984.25,1043.31 ; R2.2 1135.83,1019.68 1062.99,1019.68 ; v1(1480.71,587.4) 1412.6,587.4 C7.1 1220.47,779.53 C6.1 1220.47,854.33 1200.79,874.02 1141.73,874.02 1110.24,905.51 1110.24,972.44 1062.99,1019.68 ; C13.1 C12.1 1421.26,1252.36 1399.21,1274.41 1399.21,1506.69 1374.41,1531.5 ; RV1.1 1592.13,1531.5 ; v1(1700,587.4) C15.1 1700.45,532.68 1752.81,480.31 R1.2 1814.17,370.47 R7.2 ; v1(1765.35,1358.27) 1765.35,1209.84 1790.55,1184.65 C14.1 1792.91,1152.36 v1(1792.91,1055.91) ; v1(1909.84,1055.91) 1949.21,1016.54 R6.2 ; U1.3 2469.29,1124.41 C1.1 2324.41,1348.43 C2.1 2237.4,1375.98 P1.1 2081.89,1531.5 1592.13,1531.5 ; 984.25,1043.31 984.25,1097.8 C10.1 940.94,1141.1 940.94,1480.32 992.13,1531.5 1374.41,1531.5 ; 984.25,1043.31 1007.87,1019.68 1062.99,1019.68 ; 1374.41,1531.5 1592.13,1531.5
  Bottom Layer w19.68: v1(1480.71,587.4) v1(1700,587.4) ; RV1.1 v1(1765.35,1358.27) ; v1(1792.91,1055.91) v1(1909.84,1055.91)
+5V: C4.1 C5.1 C11.1 J3.6 L1.2 LD1.1 R4.2 R5.2 U2.4 U4.1 | length 2615.7
  Top Layer w15: LD1.1 1710.63,39.37 2027.56,39.37 2070.87,82.68 J3.6
  Top Layer w27.56: U2.4 765.75,773.62 984.25,555.12 ; L1.2 994.09,379.92 ; U4.1 R4.2 984.25,555.12 ; C5.1 1305.83,522.99 C11.1 ; LD1.1 1429.96,157.48 C4.1 1207.52,379.92 994.09,379.92 ; 984.25,555.12 1016.38,522.99 C11.1 ; 994.09,379.92 1059.06,444.88 C11.1
AD_CH_IN: RV1.2 U3.12 | length 853.5
  Top Layer w10: v1(1400.39,793.31) U3.12 ; v1(1485.83,1112.6) 1485.83,1161.02 1521.26,1196.46 1589.37,1196.46 1607.48,1214.57 1607.48,1416.14 RV1.2
  Bottom Layer w10: v1(1400.39,793.31) 1485.83,878.74 v1(1485.83,1112.6)
BOOT0: R3.2 U3.44 | length 201.8
  Top Layer w10: U3.44 1596.46,1166.14 R3.2
diode: Q1.1 U3.13 | length 301.3
  Top Layer w10: U3.13 1517.72,519.68 Q1.1
EN: U1.15 U3.25 | length 1381.3
  Top Layer w10: v1(1764.57,448.43) 1764.57,325.2 1785.43,304.33 2375.59,304.33 v1(2415.35,344.09) ; v1(1764.57,677.56) 1792.83,705.83 U3.25 ; U1.15 2548.03,394.49 v1(2548.43,394.09)
  Bottom Layer w10: v1(1764.57,448.43) v1(1764.57,677.56) ; v1(2415.35,344.09) 2465.35,394.09 v1(2548.43,394.09)
G0: U1.5 U3.32 | length 879.9
  Top Layer w10: U3.32 1832.68,931.1 1863.39,961.81 1863.39,1110.55 1889.53,1136.69 1889.53,1167.09 1934.25,1211.81 v1(2311.81,1211.81) ; U1.5 v1(2311.81,1157.09)
  Bottom Layer w10: v1(2311.81,1157.09) v1(2311.81,1211.81)
GND: C1.2 C2.2 C3.2 C4.2 C5.2 C6.2 C7.2 C8.2 C9.2 C10.2 C11.2 C12.2 C13.2 C14.2 C15.2 D1.1 H1.1 H2.1 H3.1 H4.1 J1.2 J3.8 P1.4 Q1.2 R3.1 R5.1 RESET.2 RV1.3 U1.1 U1.2 U1.9 U1.16 U2.3 U2.6 U3.8 U3.23 U3.35 U3.47 U4.2
  other v1: 2173.62,167.72 2173.62,201.57 1684.25,412.6 1715.35,411.81 2023.62,439.37 1471.26,445.28 1367.72,451.18 1405.12,450.79 1471.26,473.23 2024.41,493.31 390.94,578.74 2606.3,582.68 2644.88,582.28 1118.5,588.19 1118.9,622.44 391.73,624.41 1172.44,762.6 1144.09,775.98 1714.96,801.57 1714.57,831.1 1522.44,872.44 1550.79,872.83 1022.05,889.76 1022.05,918.11 1190.16,931.5 1189.76,966.14 708.66,988.58 1702.76,990.16 1731.89,989.76 682.68,1010.24 1111.02,1076.77 1110.63,1116.93 1537.4,1124.8 1537.01,1153.94 2556.69,1166.54 2610.24,1166.14 2216.93,1263.39 1506.69,1303.15 1838.58,1305.51 1803.54,1306.3 2261.02,1309.45 1506.69,1336.22 1650.79,1357.87 1684.65,1357.87 1353.94,1406.69 1322.05,1407.09 1010.24,1448.82 2279.13,1459.45 2316.54,1460.24 1010.24,1487.4 522.44,1507.48 820.47,1507.48 875.59,1507.09 585.83,1508.27 648.03,1508.27 701.97,1508.27 761.81,1508.27
MISO: R1.1 U1.14 U3.27 | length 1708.2
  Top Layer w10: U3.27@1792.83,831.77 U3.27 1793.74,831.77 1843.9,831.77 1869.84,805.83 1869.84,723.39 1814.17,667.72 R1.1 2077.17,555.12 ccw(c2077.17,566.02) 2088.07,566.02 2088.07,597.44 cw(c2098.98,597.44) 2098.98,608.34 cw(c2098.98,597.44) 2109.88,597.44 2109.88,555.12 2109.88,541.62 ccw(c2120.79,541.62) 2120.79,530.72 ccw(c2120.79,541.62) 2131.69,541.62 2131.69,555.12 2131.69,597.44 cw(c2142.6,597.44) 2142.6,608.34 cw(c2142.6,597.44) 2153.5,597.44 2153.5,555.12 2153.5,544.81 ccw(c2164.41,544.81) 2164.41,533.9 ccw(c2164.41,544.81) 2175.31,544.81 2175.31,555.12 2175.31,597.44 cw(c2186.22,597.44) 2186.22,608.34 cw(c2186.22,597.44) 2197.13,597.44 2197.13,555.12 2197.13,544.57 ccw(c2208.03,544.57) 2208.03,533.66 ccw(c2208.03,544.57) 2218.94,544.57 2218.94,555.12 2218.94,597.44 cw(c2229.84,597.44) 2229.84,608.34 cw(c2229.84,597.44) 2240.75,597.44 2240.75,555.12 2240.75,544.81 ccw(c2251.65,544.81) 2251.65,533.9 ccw(c2251.65,544.81) 2262.56,544.81 2262.56,555.12 2262.56,597.44 cw(c2273.46,597.44) 2273.46,608.34 cw(c2273.46,597.44) 2284.37,597.44 2284.37,566.02 ccw(c2295.28,566.02) 2295.28,555.12 2307.09,555.12 2444.88,555.12 2469.29,530.71 U1.14
MOSI: R6.1 U1.13 U3.28 | length 1708.2
  Top Layer w10: U3.28 1793.74,851.46 R6.1@1949.21,851.46 ; R6.1 R6.1@1949.21,851.46 ; U1.13 2390.55,394.09 2412.2,372.44 2665.75,372.44 2689.37,396.06 2689.37,609.45 2668.5,630.32 1985.43,630.32 1949.21,666.54 R6.1@1949.21,851.46
NetD1_2: D1.2 L1.1 U2.2 | length 683.7
  Top Layer w39.37: D1.2 L1.1 631.89,476.38 U2.2
NetLD1_2: LD1.2 Q1.3 | length 268.7
  Top Layer w27.56: Q1.3 1690.94,214.57 LD1.2
NetR4_1: R4.1 U4.3 | length 137.8
  Top Layer w27.56: R4.1 1059.05,719.68 U4.3
OSC_IN: C8.1 U3.5 Y1.1 | length 677
  Top Layer w10: C8.1 1261.18,1293.94 Y1.1 1309.06,1293.31 1389.76,1212.6 1389.76,952.76 1411.42,931.1 U3.5
OSC_OUT: C9.1 U3.6 Y1.2 | length 900.3
  Top Layer w10: C9.1 1146.3,1369.92 Y1.2 1069.68,1221.65 1137.8,1153.54 1314.96,1153.54 1334.65,1133.86 1334.65,956.69 1379.92,911.42 U3.6
RESET: R2.1 RESET.1 U3.7 | length 341.9
  Top Layer w10: R2.1 1289.37,950.79 RESET.1 1348.43,891.73 U3.7
RST: U1.4 U3.31 | length 911.3
  Top Layer w10: U3.31 1793.74,912.32 1839.18,912.32 1881.26,954.41 1881.26,1103.15 1907.4,1129.29 1907.4,1158.58 1935.04,1186.22 2358.66,1186.22 2390.55,1154.33 U1.4
RXD: J3.2 U3.21 | length 813.3
  Top Layer w10: U3.21 1675.2,652.84 1631.34,608.98 1631.34,351.73 v1(1724.8,258.27) ; v1(1821.26,258.27) 1901.97,258.27 1944.88,215.35 J3.2
  Bottom Layer w10: v1(1724.8,258.27) v1(1821.26,258.27)
SCK: R7.1 U1.12 U3.26 | length 1707
  Top Layer w10: U3.26 1837.4,812.99 1851.97,798.43 1851.97,731.1 1757.87,637.01 1757.87,536.22 1777.56,516.54 1849.21,516.54 1873.23,492.52 R7.1@1873.23,355.12 ; R7.1 1896.85,378.35 2059.06,378.35 2063.82,378.35 ccw(c2063.82,384.49) 2069.96,384.49 cw(c2080.87,384.49) 2080.87,395.39 cw(c2080.87,384.49) 2091.77,384.49 2091.77,378.35 2091.77,333.11 ccw(c2102.68,333.11) 2102.68,322.2 ccw(c2102.68,333.11) 2113.58,333.11 2113.58,378.35 2113.58,392.24 cw(c2124.49,392.24) 2124.49,403.15 cw(c2124.49,392.24) 2135.39,392.24 2135.39,378.35 2135.39,333.11 ccw(c2146.3,333.11) 2146.3,322.2 ccw(c2146.3,333.11) 2157.2,333.11 2157.2,378.35 2157.2,390.79 cw(c2168.11,390.79) 2168.11,401.69 cw(c2168.11,390.79) 2179.02,390.79 2179.02,378.35 2179.02,333.11 ccw(c2189.92,333.11) 2189.92,322.2 ccw(c2189.92,333.11) 2200.83,333.11 2200.83,378.35 2200.83,390.79 cw(c2211.73,390.79) 2211.73,401.69 cw(c2211.73,390.79) 2222.64,390.79 2222.64,378.35 2222.64,333.11 ccw(c2233.54,333.11) 2233.54,322.2 ccw(c2233.54,333.11) 2244.45,333.11 2244.45,367.44 cw(c2255.35,367.44) 2255.35,378.35 2278.35,378.35 2295.67,378.35 2311.81,394.49 U1.12
SWCLK: P1.3 U3.37 | length 553.3
  Top Layer w10: U3.37 1734.25,1360.63 1770.47,1396.85 1892.91,1396.85 P1.3
SWDIO: P1.2 U3.34 | length 662.7
  Top Layer w10: U3.34 1832.28,970.47 1845.28,983.46 1845.28,1117.72 1871.65,1144.09 1871.65,1348.82 1924.02,1401.18 1997.24,1401.18 P1.2
TXD: J3.1 U3.22 | length 721.7
  Top Layer w10: U3.22 1694.88,647.24 1649.21,601.57 1649.21,383.07 1859.06,173.23 J3.1
~12V: C3.1 J1.1 U2.1 | length 689.8
  Top Layer w39.37: J1.1 165,795.2 C3.1 467.72,975.2 U2.1
pads on no net: H5.0 H6.0 H7.0 H8.0 J3.3 J3.4 J3.5 J3.7 J3.9 J3.10 U1.6 U1.7 U1.8 U1.10 U1.11 U2.5 U3.2 U3.3 U3.4 U3.10 U3.11 U3.14 U3.15 U3.16 U3.17 U3.18 U3.19 U3.20 U3.29 U3.30 U3.33 U3.38 U3.39 U3.40 U3.41 U3.42 U3.43 U3.45 U3.46 U4.4

## Polygon pours and split planes (outlines as drawn)
GND on Top Layer "Top Layer-GND 27" (solid, pour order 95): 2129.53,220.08 2124.02,214.57 2124.02,156.3 2124.8,156.3 2130.32,150.79 2190.94,150.79 2190.94,152.36 2197.24,158.66 2197.24,214.57 2191.73,220.08
GND on Top Layer "Top Layer-GND 23" (solid, pour order 94): 1795.78,986.61 1793.42,984.25 1750.11,984.25 1744.84,973.23 1693.74,973.23 1687.51,984.25 1687.51,996.06 1693.39,1006.69 1745.14,1006.69 1750.11,996.06 1793.81,996.06 1795.78,994.09
GND on Top Layer "Top Layer-GND 24" (solid, pour order 92): 1711.02,739.37 1708.66,741.73 1708.66,785.04 1697.64,790.31 1697.64,841.41 1708.66,847.64 1720.47,847.64 1731.1,841.76 1731.1,790.01 1720.47,785.04 1720.47,741.34 1718.5,739.37
GND on Top Layer "Top Layer-GND 25" (solid, pour order 88): 1460.1,875.59 1462.46,877.95 1505.77,877.95 1511.04,888.98 1562.14,888.98 1568.37,877.95 1568.37,866.14 1562.49,855.51 1510.74,855.51 1505.77,866.14 1462.07,866.14 1460.1,868.11
GND on Top Layer "Top Layer-GND 26" (solid, pour order 84): 1533.86,1061.02 1531.5,1063.39 1531.5,1106.69 1520.47,1111.96 1520.47,1163.06 1531.5,1169.29 1543.31,1169.29 1553.94,1163.41 1553.94,1111.67 1543.31,1106.69 1543.31,1062.99 1541.34,1061.02
GND on Top Layer "Top Layer-GND 3" (solid, pour order 76): 1537.4,1068.43
GND on Top Layer "Top Layer-GND 4" (solid, pour order 72): 2248.03,1324.02 2201.18,1277.17 2201.18,1248.03 2211.81,1237.4 2270.47,1237.4 2281.1,1248.03 2281.1,1316.14 2273.23,1324.02
GND on Top Layer "Top Layer-GND 5" (solid, pour order 70): 2335.04,1513.78 2328.35,1520.47 2263.78,1520.47 2256.3,1512.99 2256.3,1442.13 2266.68,1434.65 2328.74,1434.65 2335.04,1441.34
GND on Top Layer "Top Layer-GND 6" (solid, pour order 68): 1790.29,1328.61 1781.63,1319.95 1781.63,1244.36 1789.5,1236.48 1853.68,1236.48 1861.95,1244.75 1861.95,1321.52 1859.19,1321.52 1852.1,1328.61
GND on Top Layer "Top Layer-GND 7" (solid, pour order 66): 1638.39,1374.8 1632.09,1368.5 1632.09,1309.45 1638.39,1303.15 1696.26,1303.15 1702.95,1309.84 1702.95,1369.68 1697.83,1374.8
GND on Top Layer "Top Layer-GND 8" (solid, pour order 64): 1310.43,1483.07 1303.74,1476.38 1303.74,1392.52 1312.01,1384.65 1367.52,1384.65 1374.61,1391.73 1374.61,1475.59 1367.13,1483.07
MOSI on Top Layer "Top Layer-MOSI" (solid, pour order 62): 1320.08,1488.98
GND on Top Layer "Top Layer-GND 9" (solid, pour order 60): 1000,1507.09 991.73,1497.64 991.73,1436.22 1000,1427.95 1087.01,1427.95 1096.46,1437.4 1096.46,1499.21 1088.58,1507.09
MOSI on Top Layer "Top Layer-MOSI 1" (solid, pour order 58): 994.49,1500.39
MOSI on Top Layer "Top Layer-MOSI 2" (solid, pour order 56): 990.16,1500.79
GND on Top Layer "Top Layer-GND 10" (solid, pour order 54): 1013.39,935.04 1006.69,928.35 1006.69,836.02 1011.81,830.91 1029.92,830.91 1035.83,836.81 1035.83,929.53 1030.32,935.04
GND on Top Layer "Top Layer-GND 11" (solid, pour order 52): 1150.39,982.68 1141.73,974.02 1141.73,920.47 1150,912.2 1196.46,912.2 1204.72,920.47 1204.72,975.59 1197.64,982.68
GND on Top Layer "Top Layer-GND 12" (solid, pour order 50): 1043.06,1137.94 1038.98,1133.86 1038.98,1064.17 1046.85,1056.3 1120.87,1056.3 1128.35,1063.78 1128.35,1133.86 1120.87,1137.94
GND on Top Layer "Top Layer-GND 13" (solid, pour order 48): 1448.39,1350.28 1440.51,1342.4 1440.51,1295.94 1447.99,1288.46 1572.8,1288.46 1582.24,1297.91 1582.24,1345.16 1576.73,1350.67
GND on Top Layer "Top Layer-GND 14" (solid, pour order 46): 361.81,649.02 346.06,632.48 346.06,482.48 360.24,468.31 360.63,468.7 425.98,468.7 437.4,480.12 437.01,480.51 437.01,637.6 425.59,649.02
GND on Top Layer "Top Layer-GND 15" (solid, pour order 42): 2010.63,518.9 2003.15,511.42 2003.15,417.32 2012.2,408.27 2085.04,408.27 2094.09,417.32 2094.09,511.02 2086.22,518.9
GND on Top Layer "Top Layer-GND 16" (solid, pour order 40): 2596.18,601.68 2581.61,587.11 2581.61,538.29 2598.54,521.36 2598.54,432.78 2607.99,423.33 2644.21,423.33 2654.84,433.96 2654.84,519.79 2673.35,538.29 2673.35,587.11 2658.78,601.68
GND on Top Layer "Top Layer-GND 17" (solid, pour order 38): 2533.86,1197.24 2516.54,1179.92 2516.54,1038.98 2531.5,1024.02 2642.91,1024.02 2661.42,1042.52 2661.42,1181.89 2646.06,1197.24
GND on Top Layer "Top Layer-GND 18" (solid, pour order 36): 1138.58,837.8 1129.53,828.74 1129.53,680.31 1137.01,672.83 1178.35,672.83 1186.22,680.71 1186.22,829.92 1178.35,837.8
GND on Top Layer "Top Layer-GND 19" (solid, pour order 34): 1050.39,637.4 1043.31,630.32 1043.31,577.56 1051.18,569.68 1184.65,569.68 1194.49,579.53 1194.49,631.5 1187.8,638.19
no net on Top Layer "Top Layer-No Net" (solid, pour order 24): 1698.82,828.74